# Altium PCB Boost_Conv.PcbDoc
Units mm, origin at the board's own origin, x right, y up, seen from the top; angles counter-clockwise.
Board outline 11.3 x 13.46 mm, 2 copper layers (Top Layer, Bottom Layer); 8 components, 5 nets, 21 pads, 0 vias.
Unrouted connection lines stored in the file: 2.
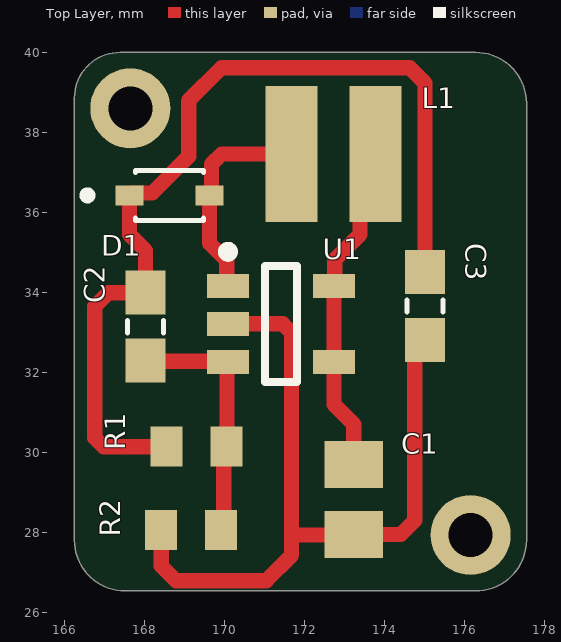
[diagram p0: Top Layer view]
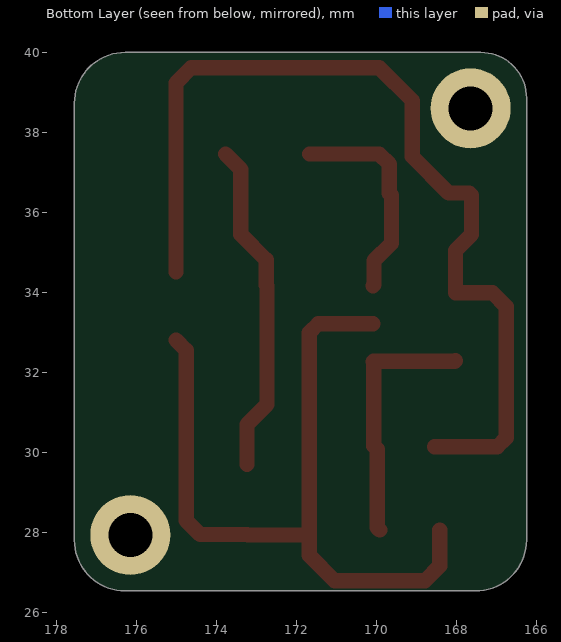
[diagram p1: Bottom Layer view, seen from below]
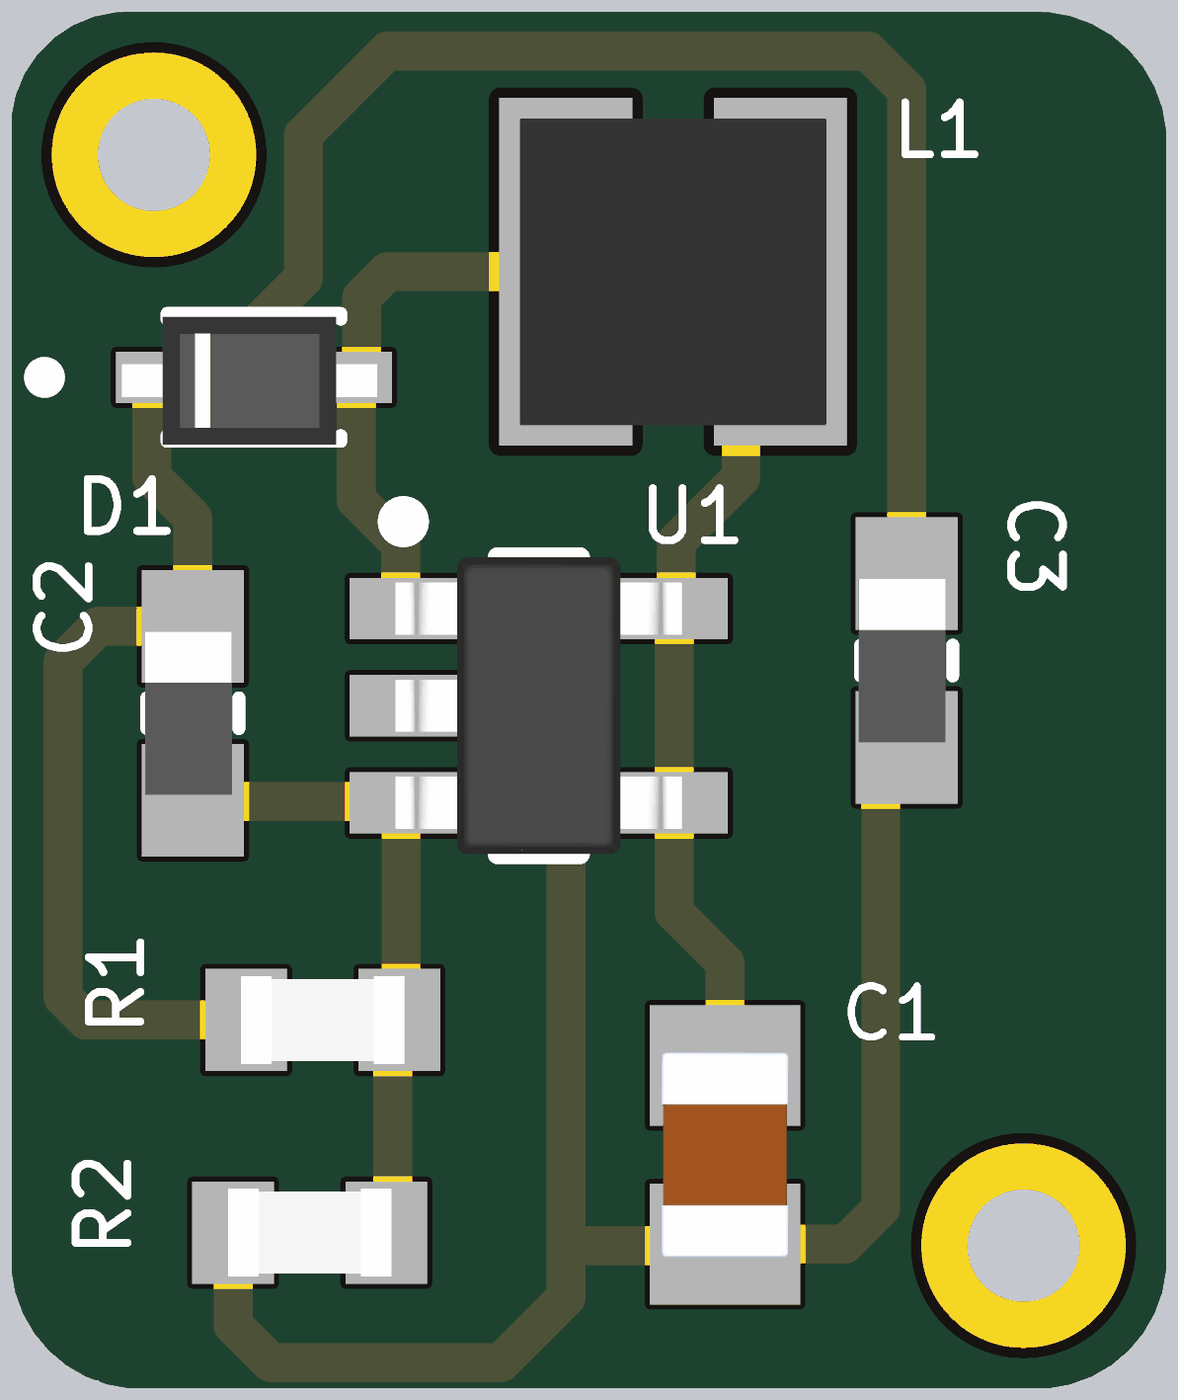
[diagram p2: 3D render of the assembled board from above, using the file's embedded part models]

## Layer stack, top to bottom
Top Solder: solder mask 0.0102, Solder Resist, Dk 3.5
Top Layer: signal copper 0.0356
Dielectric 1: dielectric 0.32, FR-4, Dk 4.8
Bottom Layer: signal copper 0.0356
Bottom Solder: solder mask 0.0102, Solder Resist, Dk 3.5

## Board outline
166.243,27.813 166.243,38.862 cw(c167.386,38.862) 167.386,40.005 176.276,40.005 cw(c176.276,38.735) 177.546,38.735 177.546,27.813 cw(c176.276,27.813) 176.276,26.543 167.513,26.543 cw(c167.513,27.813)

## Design rules (kind name [scope] priority, off if disabled: settings)
Clearance [All] p1: gap=0.9 ignorepadtopadclearanceinfootprint=FALSE except(0: Arc-Text Arc-Hole Track-Text Track-Hole SMDPad-Hole THPad-Hole Via-Hole Fill-Hole Poly-Hole Region-Hole Text-Text Text-Hole; 0.152: Arc-Arc Arc-Track Arc-SMDPad Arc-THPad Arc-Via Track-Track Track-SMDPad Track-THPad Track-Via SMDPad-SMDPad SMDPad-THPad SMDPad-Via SMDPad-Text THPad-THPad THPad-Via THPad-Text Via-Via Via-Text Fill-Text Poly-Text Region-Text)
PolygonConnect [All] p1: connectstyle=Relief reliefconductorwidth=0.254 reliefentries=4 polygonreliefangle="90 Angle" airgapwidth=0.254
RoutingVias [All] p1: holewidth=0.5 width=0.8 viastyle="Through Hole" minholewidth=0.3 minwidth=0.5 maxholewidth=1 maxwidth=2
SolderMaskExpansion [All] p1: expansion=0.102 istentingtop=FALSE
Width [All] p1: maxlimit=1 minlimit=0.15 preferedwidth=0.15
30 further rules are at their usual default settings.

## Components (designator, comment, footprint, x,y, rotation, side; value= is the part's Value field where it differs from the comment)
C1 "4.7uF" CAP-0805-NP0 173.228,28.829 r270 top
C2 "22pF" F981C475MMA 168.021,33.147 r270 top
C3 "1uF" F981C475MMA 175.006,33.662 r270 top
D1 "1N5824" SOD323F 168.656,36.322 r0 top
L1 "10u" IND_1212 172.72,37.465 r180 top
R1 "2.2M" RES_0603 169.291,30.146 r180 top
R2 "160k" RES_0603 169.164,28.067 r0 top
U1 "TPS61040DBVR" SOT-23-5 171.45,33.147 r0 top

## Footprints (in the part's own frame and the unit in brackets; to place one, negate y for a bottom-side part, rotate by r counter-clockwise, add the part's x,y. Pads: shape width x height; smd on the part's side, far side on the other; paste and mask are expansions set on the pad)
CAP-0805-NP0 [mm]
  rect 1.18x1.47 smd mask+0.05: 1(-0.874,0) 2(0.874,0)
  body extent -1,-0.63 1,0.63, height 1.15
F981C475MMA [mm]
  rect 1.1x1 smd mask+0.05: 1(-0.85,0) 2(0.85,0)
  silkscreen extent -0.15,-0.45 0.15,0.45, body extent -0.8,-0.47 0.8,0.38, height 0.9
IND_1212 [mm]
  rect 1.3x3.4 smd: 1(-1.05,0) 2(1.05,0)
  body extent -1.5,-1.5 1.5,1.5, height 1.2
RES_0603 [mm]
  rect 0.8x1 smd mask+0.05: 1(-0.75,0) 2(0.75,0)
  body extent -0.8,-0.43 0.8,0.43, height 0.52
SOD323F [mm]
  rect 0.7x0.5 smd mask+0.05: 1(0.962,0.109) 2(-1.038,0.109)
  silkscreen extent -2.19,-0.52 0.81,0.73, body extent -1.33,-0.55 1.17,0.7, height 1.1
SOT-23-5 [mm]
  rect 1.05x0.6 smd mask+0.05: 1(-1.37,1.024) 2(-1.37,0.074) 3(-1.37,-0.876) 4(1.28,-0.876) 5(1.28,1.024)
  silkscreen extent -1.49,-1.38 0.36,2, body extent -1.44,-1.38 1.36,1.52, height 1.45

## Part data
C1: library part CAP-0805-NP0-10nF, "Cap Ceramic 0.01uF 50V C0G 5% Pad SMD 0805 125°C T/R", Manufacturer=Yageo, Manufacturer Part Number=CC0805JKNPO9BN103, Supplier Part Number 1=50AJ2782, Category="Ceramic Capacitors", Designer=ZehraOzkan, Pricing 1="3000=0,12400, 6000=0,10900, 12000=0,09900, 18000=0,09300, 30000=0,08600 (USD)", RoHS=Yes, RoHS Compliant=Yes, Stock 1=12000, Supplier 1=Newark
C2 C3: library part CAP_0603_16V_Tantalum, "Cap Tant Solid 4.7uF 16V M CASE 20%( 1.6 X 0.85 X 0.8mm) Inward L SMD 12 Ohm 125C T/R", Capacitance=4.7uF, Case Code (Metric)=1608, Case Code (Imperial)=0603, ESR (Equivalent Series Resistance)=12R, Manufacturer="Kyocera AVX", Manufacturer Part Number=F981C475MMA, Max Operating Temperature=125°C, Min Operating Temperature=-55°C, Supplier Part Number 1=1361275, Tolerance=20%, Voltage Rating=16V, Case/Package=0603, Category="Tantalum Capacitors", ComponentLink1Description=http://www.farnell.com/datasheets/2602422.pdf?src-supplier=Farnell, ComponentLink1URL=http://www.farnell.com/datasheets/2602422.pdf?src-supplier=Farnell, ComponentLink2Description=http://www.mouser.com/ds/2/40/AVX_F98%20DTSH%2008_16-974527.pdf?src-supplier=Mouser, ComponentLink2URL=http://www.mouser.com/ds/2/40/AVX_F98%20DTSH%2008_16-974527.pdf?src-supplier=Mouser, ComponentLink3Description=http://datasheets.avx.com/F98.pdf?src-supplier=Digi-Key, ComponentLink3URL=http://datasheets.avx.com/F98.pdf?src-supplier=Digi-Key, ComponentLink4Description=http://www.farnell.com/datasheets/2602422.pdf?src-supplier=Newark, ComponentLink4URL=http://www.farnell.com/datasheets/2602422.pdf?src-supplier=Newark, Features="General Purpose", Mount="Surface Mount", Packaging="Tape and Reel", RoHS=Yes, RoHS Compliant=Yes, Stock 1=1, Supplier 1=RSComponents
D1: "Diode Schottky 30V 5A 2-Pin Axial Leaded Tray", Average Rectified Current=5A, Case/Package=Axial, Forward Voltage=490mV, Manufacturer=Microsemi, Max Operating Temperature=125°C, Max Repetitive Reverse Voltage (Vrrm)=30V, Max Reverse Current=10mA, Min Operating Temperature=-65°C, Peak Non-Repetitive Surge Current=500A, Supplier Part Number 1=34AJ0587, Category="Rectifier Diodes", ComponentLink1Description=http://www.microsemi.com/document-portal/doc_download/5865-1n5823-25-pdf?src-supplier=Avnet, ComponentLink1URL=http://www.microsemi.com/document-portal/doc_download/5865-1n5823-25-pdf?src-supplier=Avnet, ComponentLink2Description=https://www.microsemi.com/document-portal/doc_download/5865-1n5823-25-datasheet?src-supplier=Digi-Key, ComponentLink2URL=https://www.microsemi.com/document-portal/doc_download/5865-1n5823-25-datasheet?src-supplier=Digi-Key, ComponentLink3Description=http://www.microsemi.com/datasheets/1N5823-25.PDF?src-supplier=Mouser, ComponentLink3URL=http://www.microsemi.com/datasheets/1N5823-25.PDF?src-supplier=Mouser, Designer=ZehraOzkan, Element Configuration=Single, Forward Current=5A, Manufacturer Part Number=1N5824, Max Reverse Voltage (DC)=30V, Mount="Through Hole", Number of Pins=2, Packaging=Bulk, Radiation Hardening=No, RoHS=Yes, RoHS Compliant=Yes, Series=-, Supplier 1=Newark
L1: library part IND_47uH, "Fixed Ind 47UH 390MA 2.3 Ohm SMD", Case Code (Metric)=3030, Case Code (Imperial)=1212, Current Rating=390mA, DC Resistance (DCR)=2.3R, Manufacturer="Wurth Electronics", Manufacturer Part Number=78438335470, Max Operating Temperature=125°C, Min Operating Temperature=-40°C, Ratings=AEC-Q200, Saturation Current=1.18A, Self Resonant Frequency=8MHz, Supplier Part Number 1=732-6947-1-ND, Test Frequency=100kHz, Tolerance=30%, Inductance=47uH, Case/Package=1212, Category="Fixed Inductors", ComponentLink1Description=https://media.digikey.com/pdf/Data%20Sheets/Wurth%20Electronics%20PDFs/Q+_Products_Flyer.pdf?src-supplier=Digi-Key, ComponentLink1URL=https://media.digikey.com/pdf/Data%20Sheets/Wurth%20Electronics%20PDFs/Q+_Products_Flyer.pdf?src-supplier=Digi-Key, Core Material=Ferrite, Designer=ZehraOzkan, Height - Seated (Max)=0.059inch, Length=0.118inch, Mount="Surface Mount", Packaging="Cut Tape", Pricing 1="1=2,11, 50=1,97, 250=1,803, 500=1,672 (USD)", RoHS=Yes, RoHS Compliant=Yes, Series=WE-MAIA, Shielding=Shielded, Stock 1=15002, Supplier 1=Digi-Key, Width=0.118inch
R1 R2: library part RES_0603, "Resistor SMD 0603"
U1: "Conv DC-DC 1.8V to 6V Step Up Single-Out 1.8V to 28V 0.4A 5-Pin SOT-23 T/R", Case/Package=SOT-23-5, Current Rating=28mA, Frequency=1MHz, High Level Output Current=90mA, Manufacturer="Texas Instruments", Max Operating Temperature=85°C, Max Output Voltage=28V, Max Supply Current=50uA, Max Supply Voltage=6V, Min Operating Temperature=-40°C, Min Output Voltage=1.8V, Operating Frequency="1 MHz", Output Current=400mA, Output Current per Channel=350mA, Output Power=357mW, Package Quantity=3000, Quiescent Current=28uA, Supplier Part Number 1=296-12685-1-ND, Category="Voltage Regulators - Switching", ComponentLink1Description=https://datasheet.ciiva.com/27052/1524885-27052324.pdf?src-supplier=Jameco, ComponentLink1URL=https://datasheet.ciiva.com/27052/1524885-27052324.pdf?src-supplier=Jameco, ComponentLink2Description=https://datasheet.ciiva.com/1945/tps61041-1945382.pdf?src-supplier=Digi-Key, ComponentLink2URL=https://datasheet.ciiva.com/1945/tps61041-1945382.pdf?src-supplier=Digi-Key, ComponentLink3Description=https://datasheet.ciiva.com/1945/tps61041-1945381.pdf?src-supplier=Digi-Key, ComponentLink3URL=https://datasheet.ciiva.com/1945/tps61041-1945381.pdf?src-supplier=Digi-Key, ComponentLink4Description=https://datasheet.ciiva.com/1945/tps61041-1945383.pdf?src-supplier=Digi-Key, ComponentLink4URL=https://datasheet.ciiva.com/1945/tps61041-1945383.pdf?src-supplier=Digi-Key, ComponentLink5Description=https://datasheet.ciiva.com/3221/tps61040-3221678.pdf?src-supplier=Avnet, ComponentLink5URL=https://datasheet.ciiva.com/3221/tps61040-3221678.pdf?src-supplier=Avnet, Dimming=PWM, Efficiency=86%, Lead Free="Lead Free", Manufacturer Part Number=TPS61040DBVR, Max Output Current=90mA, Max Input Voltage=6V, Min Supply Voltage=1.8V, Min Input Voltage=1.8V, Number of Outputs=1, Number of Pins=5, Output Type=Adjustable, Output Voltage=28V, Packaging="Tape and Reel", Pricing 1="1=1,65, 10=1,471, 25=1,3956, 100=1,1465, 250=1,07176, 500=0,94712, 1000=0,74773 (USD)", Radiation Hardening=No, Reach SVHC Compliant=No, RoHS=Yes, RoHS Compliant=Yes, Series=-, Stock 1=5036, Supplier 1=Digi-Key, Switching Frequency=1MHz, Termination=SMD/SMT, Topology=Boost, Weight=0.000459oz, Width=1.6mm

## Free pads (board coordinates)
  round 2 hole 1.1: MH(167.64,38.608) MH(176.149,27.94)

## Nets (pads, with @x,y where several pads share a name; then routed paths per layer and width w, separated by ;. In a path a pad name is that pad's centre, name@x,y a point inside that pad or via, vN(x,y) a via of type N, cw(c..) or ccw(c..) an arc to the next point about the centre after c; other vN are vias at no path point)
3V3: C1.1 L1.1 U1.4 U1.5 | length 8.4
  Top Layer w0.381: C1.1 173.228,30.703 172.73,31.201 U1.4 U1.5 172.75,34.19 172.75,34.819 173.385,35.454 173.385,37.08 L1.1
+12: C2.1 C3.1 D1.2 R1.2 | length 23.6
  Top Layer w0.381: R1.2 166.974,30.146 166.751,30.369 166.751,33.655 167.093,33.997 C2.1 168.021,35.052 167.618,35.455 D1.2 167.677,36.491 168.19,36.491 169.1,37.401 169.1,38.798 169.926,39.624 174.625,39.624 175.006,39.243 C3.1
GND: C1.2 C3.2 pad.MH R2.1 U1.2 | length 19.7
  Top Layer w0.381: R2.1 168.414,27.166 168.783,26.797 171.038,26.797 171.673,27.432 171.673,27.94 ; U1.2 171.45,33.221 171.673,32.997 171.673,27.94 ; C3.2 174.752,32.558 174.752,28.305 174.402,27.955 C1.2 173.213,27.94 171.673,27.94
NetC2_2: C2.2 R1.1 R2.2 U1.3 | length 6.3
  Top Layer w0.381: C2.2 168.034,32.284 170.067,32.284 U1.3 170.061,32.251 170.061,30.166 R1.1 169.978,30.083 169.978,28.13 R2.2
NetD1_1: D1.1 L1.2 U1.1 | length 5.4
  Top Layer w0.381: U1.1 170.053,34.198 170.053,34.798 169.618,35.233 D1.1 169.672,36.486 169.672,37.211 169.926,37.465 L1.2